# EAGLE board ultrasonic_anemometer_pcb (EAGLE 7.7.0)
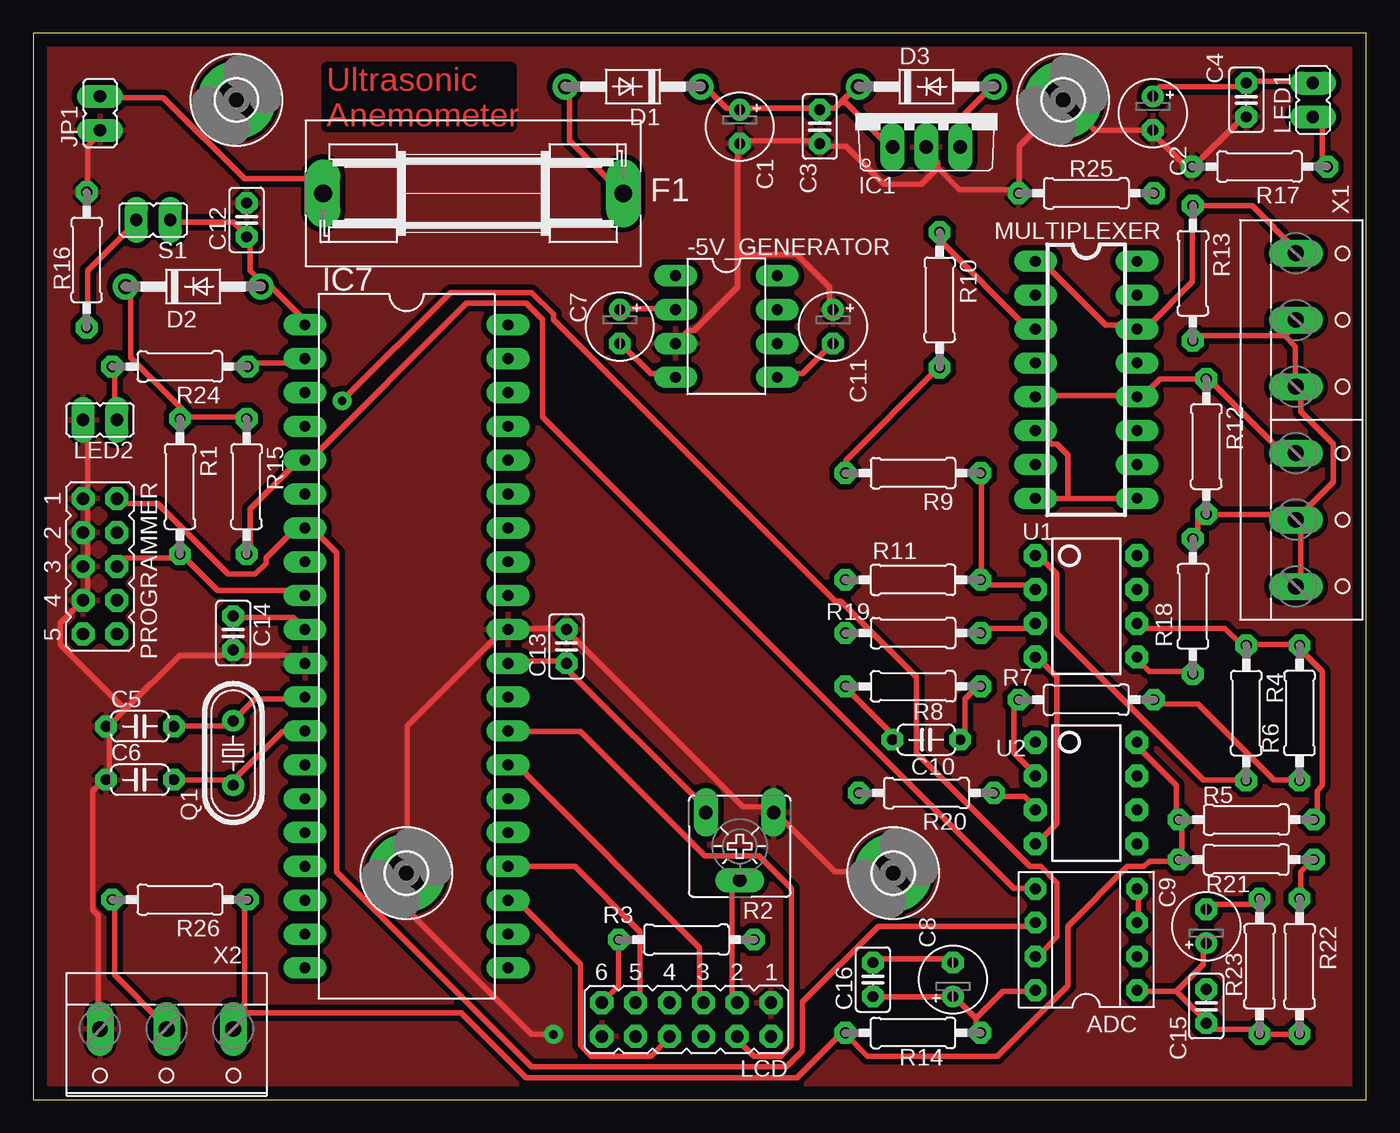
[diagram p0: board, top side]
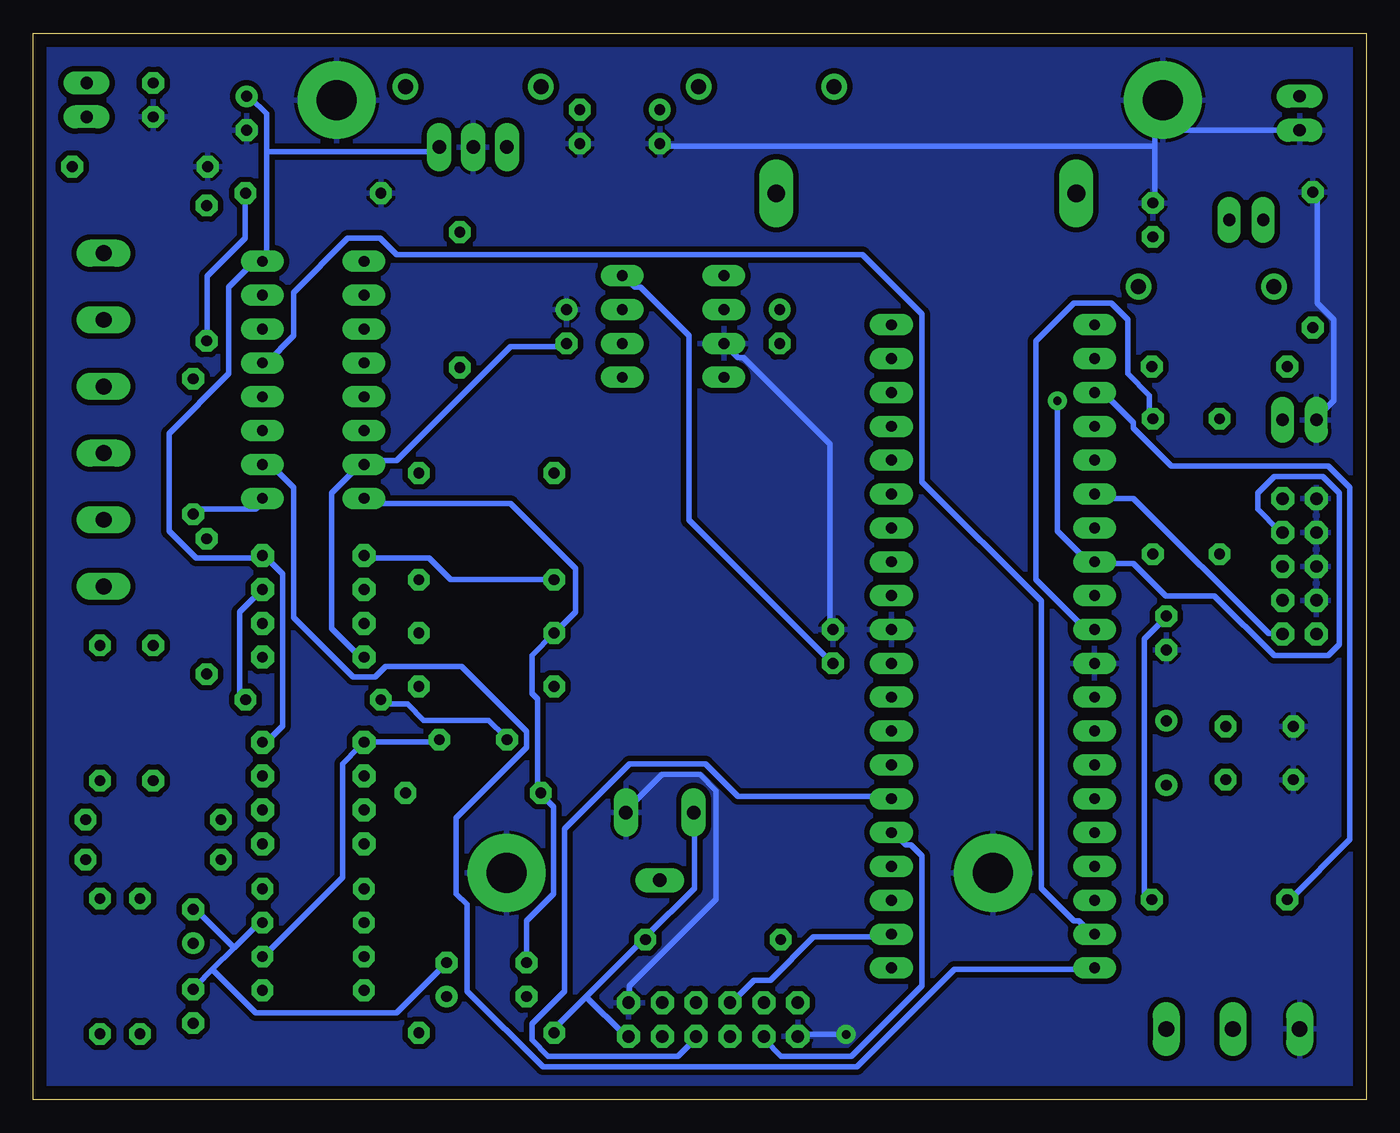
[diagram p1: board, bottom side, seen from below]

Size 100 x 80 mm. Coordinates in mm from the lower left corner, seen from the top.
Outline: 0,0 100,0 100,80 0,80 0,0
Copper layers (1*16): Top 0.035mm / dielectric 1.5mm / Bottom 0.035mm
Design rules "default *": minimum track width 16mil, minimum drill 24mil, track to track 16mil, track to pad 16mil, pad to pad 16mil, via to via 16mil, smd to smd 16mil, copper to edge 40mil, drill to drill 8mil, minimum pad ring 16mil, minimum via ring 16mil, stop-mask expansion 4mil, vias tented up to drill 0mil, thermal gap 10mil

## Footprints (pad centres in the part's own frame; a part is rotated, then mirrored left to right if it is on the bottom)
DIL08 = drill 0.813 long: 1 -3.81,-3.81; 2 -1.27,-3.81; 3 1.27,-3.81; 4 3.81,-3.81; 5 3.81,3.81; 6 1.27,3.81; 7 -1.27,3.81; 8 -3.81,3.81
DIL08' = drill 0.813 pad 1.6 octagon: 1 -3.81,-3.81; 2 -1.27,-3.81; 3 1.27,-3.81; 4 3.81,-3.81; 5 3.81,3.81; 6 1.27,3.81; 7 -1.27,3.81; 8 -3.81,3.81
E2,5-5 = drill 0.813 pad 1.6: + -1.27,0 | drill 0.813 pad 1.6 octagon: - 1.27,0
C025-025X050 = drill 0.813 octagon: 1 -1.27,0; 2 1.27,0
C050-024X044 = drill 0.813 octagon: 1 -2.54,0; 2 2.54,0
DO41-10 = drill 1.118 pad 1.93: A 5.08,0; C -5.08,0
SH22,5A = drill 1.321 pad 2.54 long: 1 -11.252,0; 2 11.252,0
3,0-PAD = drill 3 pad 5.842: B3,0 0,0
TO220V = drill 1.016 long: 1 -2.54,-2.54; 2 0,-2.54; 3 2.54,-2.54
DIL40 = drill 0.813 long: 1 -24.13,-7.62; 2 -21.59,-7.62; 3 -19.05,-7.62; 4 -16.51,-7.62; 5 -13.97,-7.62; 6 -11.43,-7.62; 7 -8.89,-7.62; 8 -6.35,-7.62; 9 -3.81,-7.62; 10 -1.27,-7.62; 11 1.27,-7.62; 12 3.81,-7.62; 13 6.35,-7.62; 14 8.89,-7.62; 15 11.43,-7.62; 16 13.97,-7.62; 17 16.51,-7.62; 18 19.05,-7.62; 19 21.59,-7.62; 20 24.13,-7.62; 21 24.13,7.62; 22 21.59,7.62; 23 19.05,7.62; 24 16.51,7.62; 25 13.97,7.62; 26 11.43,7.62; 27 8.89,7.62; 28 6.35,7.62; 29 3.81,7.62; 30 1.27,7.62; 31 -1.27,7.62; 32 -3.81,7.62; 33 -6.35,7.62; 34 -8.89,7.62; 35 -11.43,7.62; 36 -13.97,7.62; 37 -16.51,7.62; 38 -19.05,7.62; 39 -21.59,7.62; 40 -24.13,7.62
JP1 = drill 0.914 long: 1 0,-1.27; 2 0,1.27
JP6Q = drill 0.914 octagon: 1 -6.35,-1.27; 2 -6.35,1.27; 3 -3.81,-1.27; 4 -3.81,1.27; 5 -1.27,-1.27; 6 -1.27,1.27; 7 1.27,-1.27; 8 1.27,1.27; 9 3.81,-1.27; 10 3.81,1.27; 11 6.35,-1.27; 12 6.35,1.27
DIL16 = drill 0.813 long: 1 -8.89,-3.81; 2 -6.35,-3.81; 3 -3.81,-3.81; 4 -1.27,-3.81; 5 1.27,-3.81; 6 3.81,-3.81; 7 6.35,-3.81; 8 8.89,-3.81; 9 8.89,3.81; 10 6.35,3.81; 11 3.81,3.81; 12 1.27,3.81; 13 -1.27,3.81; 14 -3.81,3.81; 15 -6.35,3.81; 16 -8.89,3.81
JP5Q = drill 0.914 octagon: 1 -5.08,-1.27; 2 -5.08,1.27; 3 -2.54,-1.27; 4 -2.54,1.27; 5 0,-1.27; 6 0,1.27; 7 2.54,-1.27; 8 2.54,1.27; 9 5.08,-1.27; 10 5.08,1.27
HC49/S = drill 0.813: 1 -2.413,0; 2 2.413,0
0207/10 = drill 0.813 octagon: 1 -5.08,0; 2 5.08,0
CA6V = drill 1.016 long: A -2.54,-2.54; E 2.54,-2.54; S 0,2.54
DIP08 = drill 0.813 pad 1.727 octagon: 1 -3.81,-3.81; 2 -1.27,-3.81; 3 1.27,-3.81; 4 3.81,-3.81; 5 3.81,3.81; 6 1.27,3.81; 7 -1.27,3.81; 8 -3.81,3.81
W237-6 = drill 1.194 long: 1 -12.5,-1.27; 2 -7.5,-1.27; 3 -2.5,-1.27; 4 2.5,-1.27; 5 7.5,-1.27; 6 12.5,-1.27
W237-103 = drill 1.194 long: 1 -5,-1.29; 2 0,-1.29; 3 5,-1.29

## Placement (x,y rotation side)
-5V_GENERATOR  ICL7660  [DIL08]  52,58 270 top
ADC  ADS7822P  [DIL08']  79,12 90 top
C1  100μF  [E2,5-5]  53,73 270 top
C2  100μF  [E2,5-5]  84,74 270 top
C3  100nF  [C025-025X050]  59,73 270 top
C4  100nF  [C025-025X050]  91,75 270 top
C5  22pF  [C050-024X044]  8,28 0 top
C6  22pF  [C050-024X044]  8,24 0 top
C7  10μF  [E2,5-5]  44,58 270 top
C8  10μF  [E2,5-5]  69,9 90 top
C9  10μF  [E2,5-5]  88,13 90 top
C10  18pF  [C050-024X044]  67,27 180 top
C11  10μF  [E2,5-5]  60,58 270 top
C12  100nF  [C025-025X050]  16,66 90 top
C13  100nF  [C025-025X050]  40,34 90 top
C14  100nF  [C025-025X050]  15,35 270 top
C15  100nF  [C025-025X050]  88,7 270 top
C16  100nF  [C025-025X050]  63,9 90 top
D1  1N4004  [DO41-10]  45,76 180 top
D2  1N4004  [DO41-10]  12,61 0 top
D3  1N4004  [DO41-10]  67,76 0 top
F1  [SH22,5A]  33,68 0 top
H1  MOUNT-PAD-ROUND3.0  [3,0-PAD]  28,17 0 top
H2  MOUNT-PAD-ROUND3.0  [3,0-PAD]  64.5,17 0 top
H3  MOUNT-PAD-ROUND3.0  [3,0-PAD]  15.25,75 0 top
H4  MOUNT-PAD-ROUND3.0  [3,0-PAD]  77.25,75 0 top
IC1  7805  [TO220V]  67,74 0 top
IC7  ATMEGA1284  [DIL40]  28,34 270 top
JP1  [JP1]  5,74 0 top
LCD  [JP6Q]  49,6 180 top
LED1  [JP1]  96,75 0 top
LED2  [JP1]  5,51 90 top
MULTIPLEXER  74HC4052  [DIL16]  79,54 270 top
PROGRAMMER  [JP5Q]  5,40 270 top
Q1  25Mhz  [HC49/S]  15,26 90 top
R1  10kΩ  [0207/10]  11,46 270 top
R2  100kΩ  [CA6V]  53,19 180 top
R3  220Ω  [0207/10]  49,12 180 top
R4  10kΩ  [0207/10]  91,29 270 top
R5  220kΩ  [0207/10]  91,21 180 top
R6  100kΩ  [0207/10]  95,29 90 top
R7  10kΩ  [0207/10]  79,30 0 top
R8  10kΩ  [0207/10]  66,31 180 top
R9  4.7kΩ  [0207/10]  66,47 180 top
R10  10kΩ  [0207/10]  68,60 270 top
R11  47kΩ  [0207/10]  66,39 0 top
R12  10kΩ  [0207/10]  88,49 270 top
R13  10kΩ  [0207/10]  87,62 270 top
R14  4.7Ω  [0207/10]  66,5 0 top
R15  10kΩ  [0207/10]  16,46 270 top
R16  330Ω  [0207/10]  4,63 270 top
R17  1kΩ  [0207/10]  92,70 180 top
R18  8.2kΩ  [0207/10]  87,37 90 top
R19  10kΩ  [0207/10]  66,35 180 top
R20  4.7kΩ  [0207/10]  67,23 180 top
R21  470Ω  [0207/10]  91,18 0 top
R22  1kΩ  [0207/10]  95,10 270 top
R23  10kΩ  [0207/10]  92,10 90 top
R24  1kΩ  [0207/10]  11,55 180 top
R25  0Ω  [0207/10]  79,68 180 top
R26  4.7kΩ  [0207/10]  11,15 180 top
S1  [JP1]  9,66 90 top
U1  OPAMP-DUALDIP  [DIP08]  79,37 270 top
U2  OPAMP-DUALDIP  [DIP08]  79,23 270 top
X1  [W237-6]  96,51 270 top
X2  [W237-103]  10,4 180 top

## Library data of the parts
-5V_GENERATOR = maxim; MF: INTERSIL; MPN: ICL7660CPA; OC_FARNELL: 1018170; OC_NEWARK: 06F7441
ADC = burr-brown; MF: TEXAS INSTRUMENT CONNECTORS; MPN: ADS7816P; OC_FARNELL: 1097576; OC_NEWARK: 14M9332
C1-C16 R1 R3-R26 = rcl
D1-D3 = adafruit
F1 = fuse; MPN: 0031.7701.11; OC_FARNELL: unknown; OC_NEWARK: 04F1224
H1-H4 = holes
IC1 = linear
IC7 = avr-7
JP1 LCD LED1 LED2 PROGRAMMER S1 = jumper
MULTIPLEXER U1 U2 = SparkFun-AnalogIC
Q1 = crystal; OC_FARNELL: 1667008; OC_NEWARK: unknown
R2 = pot
X1 = con-wago-500; OC_FARNELL: unknown; OC_NEWARK: unknown
X2 = con-wago-500; MPN: 237-103; OC_FARNELL: unknown; OC_NEWARK: 18M7116

## Nets
-5V: -5V_GENERATOR.5 C11.- MULTIPLEXER.7 U1.4 U2.4
AGND: ADC.3 ADC.4 C8.- C9.- C15.1 C16.2 MULTIPLEXER.6 MULTIPLEXER.8 MULTIPLEXER.9 R12.2 R13.2 R18.2 R19.2 R20.2 R23.2 R25.1 X1.2 X1.3 X1.5 X1.6
AREF: IC7.32
DS1820_SENSOR: IC7.3 R26.2 X2.2
GENERATOR_OUT: IC7.19 MULTIPLEXER.13
GND: -5V_GENERATOR.3 C1.- C2.- C3.2 C4.2 C5.1 C6.1 C11.+ C12.2 C13.2 C14.2 H1.B3,0 H2.B3,0 H3.B3,0 H4.B3,0 IC1.2 IC7.11 IC7.31 JP1.1 LCD.1 LCD.12 LED2.2 PROGRAMMER.1 PROGRAMMER.3 PROGRAMMER.5 PROGRAMMER.7 R2.A R16.1 R17.2 R25.2 X2.3
LCD_D4: IC7.22 LCD.7
LCD_D5: IC7.23 LCD.8
LCD_D6: IC7.24 LCD.9
LCD_D7: IC7.25 LCD.10
LCD_E: IC7.26 LCD.6
LCD_RS: IC7.28 LCD.4
LCD_RW: IC7.27 LCD.5
MISO: ADC.6 IC7.7 PROGRAMMER.2
MOSI: IC7.6 PROGRAMMER.10
N$1: F1.1 JP1.2
N$2: D1.A F1.2
N$3: C1.+ C3.1 D1.C D3.C IC1.1
N$4: MULTIPLEXER.1 MULTIPLEXER.14 R13.1 X1.1
N$5: MULTIPLEXER.5 MULTIPLEXER.12 R12.1 X1.4
N$6: R9.1 R11.2 U1.2
N$7: R19.1 U1.3
N$8: R18.1 U1.5
N$9: R20.1 U2.3
N$10: C12.1 D2.A IC7.1 S1.1
N$11: C5.2 IC7.12 Q1.2
N$12: C6.2 IC7.13 Q1.1
N$13: C10.2 R7.1 R8.2 U2.2
N$14: -5V_GENERATOR.2 C7.+
N$15: -5V_GENERATOR.4 C7.-
N$16: R9.2 R10.2
N$17: R4.1 R5.1 R6.2 U1.6
N$18: R6.1 R7.2 U1.7
N$19: LCD.11 R3.2
N$20: R16.2 S1.2
N$21: LCD.3 R2.S
N$22: ADC.1 C9.+ C15.2 R22.2 R23.1
N$23: LED2.1 R24.2
N$24: LED1.1 R17.1
N$25: ADC.8 C8.+ C16.1 R14.2
N$29: R21.2 R22.1
N$30: ADC.2 C10.1 R8.1 U2.1
N$31: IC7.2 R24.1
N$33: R4.2 R11.1 U1.1
N$34: MULTIPLEXER.3 R10.1
RESET: IC7.9 PROGRAMMER.6 R1.2
SCK: ADC.7 IC7.8 PROGRAMMER.4
SS: ADC.5 IC7.5 R15.2
SWITCH_CHANNEL: IC7.20 MULTIPLEXER.10
VCC: -5V_GENERATOR.8 C2.+ C4.1 C13.1 C14.1 D2.C D3.A IC1.3 IC7.10 IC7.30 LCD.2 LED1.2 MULTIPLEXER.16 R1.1 R2.E R3.1 R5.2 R14.1 R15.1 R21.1 R26.1 U1.8 U2.8 X2.1

## Tracks (layer width: path | path; a pad name or v marks a point on that pad's centre or on a via)
-5V
  Top 0.406: -5V_GENERATOR.5 56.08,54.46 57.71,54.46 59.74,56.49 C11.- | U2.4 75.59,19.51 76.81,20.73 76.81,31.7 75.59,32.92 U1.4
  Bottom 0.406: U1.4 75.59,33.33 77.62,35.36 77.62,45.52 75.59,47.55 MULTIPLEXER.7 75.18,47.95 72.75,47.95 64.21,56.49 60.15,56.49 C11.-
AGND
  Top 0.406: 93.88,57.3 87.38,57.3 R13.2 | 93.88,57.3 94.69,58.12 X1.2 | 93.88,57.3 94.69,56.49 94.69,53.65 X1.3 95.1,53.24 95.1,51.61 97.54,49.17 97.54,46.33 95.1,43.89 X1.5 | X1.6 95.1,38.61 95.1,43.48 X1.5 | R18.2 87.38,42.27 87.38,43.48 87.78,43.89 R12.2 88.19,43.89 94.69,43.89 X1.5 | 77.62,45.11 82.5,45.11 MULTIPLEXER.9 | 77.62,45.11 75.59,45.11 MULTIPLEXER.8 | 77.62,45.11 77.62,48.36 76.81,49.17 76.4,49.17 75.59,49.99 MULTIPLEXER.6 | C9.- 88.19,14.63 91.44,14.63 91.85,15.04 R23.2 | ADC.3 82.91,13.41 82.91,15.44 ADC.4 | C16.2 63.4,10.57 68.68,10.57 C8.-
  Bottom 0.406: R25.1 84.12,67.87 84.12,64.62 86.97,61.77 86.97,57.3 R13.2 | R12.2 87.78,44.3 83.31,44.3 82.91,44.7 MULTIPLEXER.9 | 84.94,11.38 82.91,13.41 ADC.3 | 84.94,11.38 86.56,9.75 | 86.56,9.75 87.78,8.53 C15.1 | 84.94,11.38 87.78,14.22 C9.- | C16.2 62.99,10.57 62.99,13.41 60.96,15.44 60.96,21.95 61.77,22.76 R20.2 62.18,23.16 62.18,30.07 62.59,30.48 62.59,33.33 60.96,34.95 R19.2 60.55,35.36 59.33,36.58 59.33,39.83 64.21,44.7 75.18,44.7 MULTIPLEXER.8 | 86.56,9.75 83.31,6.5 72.75,6.5 69.09,10.16 C8.-
DS1820_SENSOR
  Top 0.406: R26.2 6.1,14.63 6.1,9.35 9.75,5.69 X2.2
  Bottom 0.406: IC7.3 20.32,52.83 19.51,52.83 17.48,50.8 17.48,50.39 14.63,47.55 2.85,47.55 1.22,45.92 1.22,19.51 5.69,15.04 R26.2
GENERATOR_OUT
  Bottom 0.406: IC7.19 20.73,12.6 21.54,13.41 21.95,13.41 24.38,15.85 24.38,37.39 33.33,46.33 33.33,58.93 37.8,63.4 72.75,63.4 73.97,64.62 76.4,64.62 80.47,60.55 80.47,57.3 82.5,55.27 MULTIPLEXER.13
GND  (via drill 0.61)
  Top 0.406: R16.1 4.06,68.28 4.06,71.53 4.88,72.34 JP1.1 | LED2.2 4.06,50.8 4.06,45.11 PROGRAMMER.1 4.06,44.7 4.06,42.67 PROGRAMMER.3 4.06,42.27 4.06,40.23 PROGRAMMER.5 4.06,39.83 4.06,37.8 PROGRAMMER.7 3.66,37.39 2.03,35.76 2.03,34.14 6.91,29.26 | IC7.11 20.32,32.92 19.91,33.33 15.04,33.33 C14.2 14.63,33.33 10.97,33.33 6.91,29.26 | X2.3 4.88,5.69 4.88,13.82 4.47,14.22 4.47,23.16 5.28,23.98 C6.1 5.69,24.38 5.69,27.64 C5.1 5.69,28.04 6.91,29.26 | 52.83,63.4 52.83,71.53 C1.- 53.24,71.93 58.93,71.93 C3.2 59.33,71.53 60.96,71.53 63.8,68.68 66.65,68.68 67.87,69.9 | 52.83,63.4 52.83,60.96 49.58,57.71 49.17,57.71 48.36,56.9 -5V_GENERATOR.3 | 52.83,63.4 57.3,63.4 59.74,60.96 59.74,59.33 C11.+ | C4.2 90.63,73.56 86.97,69.9 R17.2 86.56,69.9 84.12,72.34 C2.- 83.72,72.75 79.65,72.75 77.62,74.78 H4.B3,0 77.22,74.78 73.97,71.53 73.97,68.28 R25.2 73.56,68.28 69.49,68.28 67.87,69.9 | 67.87,69.9 67.87,70.31 67.06,71.12 IC1.2 | v39.01,4.88 37.39,4.88 28.04,14.22 28.04,16.66 H1.B3,0 28.04,17.07 28.04,28.04 35.36,35.36 IC7.31 35.76,35.36 39.83,35.36 C13.2 40.23,34.95 53.24,21.95 55.27,21.95 R2.A 55.68,21.54 60.15,17.07 64.21,17.07 H2.B3,0
  Bottom 0.406: 15.85,72.75 15.85,74.37 15.44,74.78 H3.B3,0 15.85,72.75 | 15.85,72.75 15.85,71.53 | 15.85,71.53 15.85,67.46 C12.2 | 15.85,72.75 5.28,72.75 JP1.1 | R16.1 3.66,67.87 3.66,59.74 2.44,58.52 2.44,52.43 3.66,51.21 LED2.2 | v39.01,4.88 42.27,4.88 LCD.12 | LCD.1 55.27,7.32 55.27,8.53 48.77,15.04 48.77,23.16 49.99,24.38 52.83,24.38 55.27,21.95 R2.A | -5V_GENERATOR.3 47.95,56.49 47.14,55.68 46.74,55.68 40.23,49.17 40.23,35.36 C13.2 | 15.85,71.53 52.83,71.53 C1.-
  pour Bottom (isolate 0.406): -1,80 100,80 100,-1 -1,-1
  pour Top: -2,80 100,80 100,-1 -2,-1
LCD_D4
  Bottom 0.406: IC7.22 35.76,12.19 41.45,12.19 44.7,8.94 45.92,8.94 47.55,7.32 LCD.7
LCD_D5
  Top 0.406: IC7.23 35.76,14.63 36.58,14.63 41.05,10.16 41.05,4.06 41.86,3.25 46.33,3.25 47.55,4.47 LCD.8
LCD_D6
  Top 0.406: IC7.24 35.76,17.48 40.64,17.48 45.52,12.6 45.52,7.32 LCD.9
LCD_D7
  Bottom 0.406: IC7.25 35.36,19.91 34.54,19.1 34.14,19.1 33.33,18.29 33.33,8.53 38.61,3.25 43.89,3.25 45.11,4.47 LCD.10
LCD_E
  Bottom 0.406: IC7.26 35.76,22.76 47.14,22.76 49.58,25.2 55.27,25.2 60.15,20.32 60.15,8.13 62.59,5.69 62.59,4.47 61.37,3.25 51.61,3.25 50.39,4.47 LCD.6
LCD_RS
  Top 0.406: IC7.28 35.76,27.64 41.05,27.64 50.39,18.29 54.46,18.29 56.9,15.85 56.9,4.06 56.08,3.25 54.05,3.25 52.83,4.47 LCD.4
LCD_RW
  Top 0.406: IC7.27 35.76,24.79 36.58,24.79 49.99,11.38 49.99,7.32 LCD.5
MISO
  Top 0.406: PROGRAMMER.2 6.5,44.7 9.35,44.7 14.63,39.42 16.66,39.42 17.48,40.23 17.48,40.64 19.51,42.67 20.32,42.67 IC7.7 20.73,43.08 22.76,41.05 22.76,17.07 37.39,2.44 56.49,2.44 57.71,3.66 57.71,7.32 63.4,13.01 75.18,13.01 ADC.6
MOSI
  Bottom 0.406: IC7.6 20.32,45.11 17.48,45.11 7.32,34.95 6.5,34.95 PROGRAMMER.10
N$1
  Top 0.406: JP1.2 5.28,75.18 9.75,75.18 15.85,69.09 20.73,69.09 21.54,68.28 F1.1
N$2
  Top 0.406: D1.A 40.23,76 40.23,71.93 43.89,68.28 F1.2
N$3
  Top 0.406: D1.C 50.39,76 52.02,74.37 52.83,74.37 C1.+ 53.24,74.37 58.93,74.37 C3.1 59.33,74.37 60.15,74.37 60.55,74.78 | 60.55,74.78 61.77,76 D3.C | 60.55,74.78 60.96,74.78 64.21,71.53 IC1.1
N$4
  Top 0.406: X1.1 94.69,63.8 91.44,67.06 87.38,67.06 R13.1 86.97,67.06 86.97,61.37 83.72,58.12 82.91,58.12 MULTIPLEXER.14 82.5,58.12 80.47,58.12 75.59,62.99 MULTIPLEXER.1
N$5
  Top 0.406: MULTIPLEXER.5 75.59,52.83 82.5,52.83 MULTIPLEXER.12 82.91,52.43 84.53,54.05 87.78,54.05 R12.1 88.19,54.05 93.47,48.77 94.69,48.77 X1.4
N$6
  Top 0.406: U1.2 75.18,38.61 71.12,38.61 R11.2 71.12,39.01 71.12,46.74 R9.1
N$7
  Top 0.406: R19.1 71.12,35.36 75.18,35.36 U1.3
N$8
  Top 0.406: R18.1 86.97,32.11 83.72,32.11 82.91,32.92 U1.5
N$9
  Top 0.406: R20.1 72.34,22.76 74.37,22.76 75.18,21.95 U2.3
N$10
  Top 0.406: IC7.1 20.32,58.52 17.48,61.37 D2.A 17.07,61.37 16.26,62.18 16.26,64.62 C12.1 15.85,65.02 15.04,65.84 10.57,65.84 S1.1
N$11
  Top 0.406: C5.2 10.57,28.04 14.63,28.04 Q1.2 15.04,28.45 16.66,30.07 20.32,30.07 IC7.12
N$12
  Top 0.406: C6.2 10.57,23.98 14.63,23.98 Q1.1 15.04,23.98 18.69,27.64 20.32,27.64 IC7.13
N$13
  Top 0.406: R7.1 73.56,29.67 73.56,26.01 75.18,24.38 U2.2 | R8.2 60.96,30.89 64.62,27.23 C10.2
  Bottom 0.406: R7.1 73.56,29.67 71.93,29.67 70.71,28.45 65.84,28.45 64.62,27.23 C10.2
N$14
  Top 0.406: C7.+ 44.3,59.33 47.95,59.33 -5V_GENERATOR.2
N$15
  Top 0.406: -5V_GENERATOR.4 47.95,54.46 46.33,54.46 44.3,56.49 C7.-
N$16
  Top 0.406: R9.2 60.96,47.14 60.96,47.95 67.87,54.86 R10.2
N$17
  Top 0.406: R5.1 96.32,21.13 96.32,23.16 96.72,23.57 96.72,32.11 95.1,33.73 R6.2 94.69,34.14 91.03,34.14 R4.1 90.63,34.14 89.41,35.36 82.91,35.36 U1.6
N$18
  Top 0.406: R6.1 94.69,23.98 93.07,23.98 87.38,29.67 84.12,29.67 R7.2
  Bottom 0.406: U1.7 82.91,38.2 84.53,36.58 84.53,30.48 84.12,30.07 R7.2
N$19
  Top 0.406: R3.2 43.89,11.79 43.89,8.53 42.67,7.32 LCD.11
N$20
  Top 0.406: R16.2 4.06,58.12 4.06,62.18 7.72,65.84 S1.2
N$21
  Top 0.406: LCD.3 52.43,7.32 52.43,15.85 52.83,16.26 R2.S
N$22
  Top 0.406: R22.2 94.69,4.88 92.25,4.88 R23.1 91.85,5.28 88.59,5.28 88.19,5.69 C15.2 87.78,6.1 85.75,8.13 | 85.75,8.13 82.91,8.13 ADC.1 | 85.75,8.13 87.78,10.16 87.78,11.38 C9.+
N$23
  Top 0.406: R24.2 6.1,54.86 6.1,51.21 LED2.1
N$24
  Top 0.406: R17.1 96.72,70.31 96.72,73.15 96.32,73.56 LED1.1
N$25
  Top 0.406: 70.71,6.1 70.71,5.28 R14.2 | 70.71,6.1 69.09,7.72 C8.+ 68.68,7.72 63.4,7.72 C16.1 | 70.71,6.1 72.75,8.13 75.18,8.13 ADC.8
N$29
  Top 0.406: R22.1 95.1,15.44 95.1,17.07 95.91,17.88 R21.2
N$30
  Top 0.406: C10.1 69.9,27.23 69.9,30.07 70.71,30.89 R8.1
  Bottom 0.406: ADC.2 82.5,10.97 76.81,16.66 76.81,25.2 75.59,26.42 U2.1 75.18,26.82 69.9,26.82 C10.1
N$31
  Top 0.406: R24.1 16.26,55.27 20.32,55.27 IC7.2
N$33
  Top 0.406: R4.2 90.63,23.98 87.78,23.98 76.81,34.95 76.81,39.42 75.59,40.64 U1.1
  Bottom 0.406: R11.1 60.96,39.01 68.68,39.01 70.31,40.64 75.18,40.64 U1.1
N$34
  Top 0.406: MULTIPLEXER.3 75.18,58.12 74.37,58.12 68.28,64.21 68.28,65.02 R10.1
RESET
  Top 0.406: PROGRAMMER.6 6.5,40.23 6.91,40.64 10.97,40.64 R1.2 11.38,40.64 13.82,38.2 20.32,38.2 IC7.9
SCK  (via drill 0.61)
  Top 0.406: v23.16,52.43 31.29,60.55 37.39,60.55 39.01,58.93 39.01,58.52 60.15,37.39 60.55,37.39 66.24,31.7 66.24,26.01 74.78,17.48 75.59,17.48 76.81,16.26 76.81,12.19 75.59,10.97 ADC.7
  Bottom 0.406: PROGRAMMER.4 6.5,42.67 8.13,44.3 8.13,45.52 6.91,46.74 3.25,46.74 2.03,45.52 2.03,34.14 2.85,33.33 6.91,33.33 11.38,37.8 15.04,37.8 17.48,40.23 20.32,40.23 IC7.8 20.73,40.23 23.16,42.67 v23.16,52.43
SS
  Top 0.406: R15.2 16.26,41.05 16.26,44.3 20.32,48.36 IC7.5 20.73,47.95 32.51,59.74 36.98,59.74 38.2,58.52 38.2,51.21 73.56,15.85 75.18,15.85 ADC.5
SWITCH_CHANNEL
  Bottom 0.406: IC7.20 20.73,9.75 30.89,9.75 38.2,2.44 61.77,2.44 67.46,8.13 67.46,14.63 68.28,15.44 68.28,21.13 62.99,26.42 62.99,27.64 67.87,32.51 73.56,32.51 74.37,31.7 76,31.7 80.47,36.17 80.47,45.92 82.5,47.95 MULTIPLEXER.10
VCC
  Top 0.406: U2.8 82.91,26.42 85.75,23.57 85.75,21.13 R5.2 86.16,20.73 86.16,18.29 R21.1 85.75,17.88 83.72,17.88 83.31,17.48 82.09,17.48 77.62,13.01 77.62,8.53 72.34,3.25 62.59,3.25 60.96,4.88 R14.1 60.55,4.88 57.3,1.63 36.98,1.63 32.11,6.5 15.85,6.5 | IC1.3 69.9,71.53 69.9,73.97 71.93,76 D3.A | LED1.2 95.91,76.4 91.03,76.4 C4.1 90.63,76 84.53,76 84.12,75.59 C2.+ | 11.79,51.21 15.85,51.21 R15.1 | 11.79,51.21 11.38,51.21 R1.1 11.79,51.21 | 11.79,51.21 7.32,55.68 7.32,60.96 D2.C | C14.1 15.04,36.17 19.51,36.17 20.32,35.36 IC7.10 | 15.85,6.5 15.85,14.63 R26.1 | 15.85,6.5 15.04,5.69 X2.1 15.85,6.5 | IC7.30 35.76,32.92 39.83,32.92 C13.1 39.83,32.51 50.39,21.95 R2.E
  Bottom 0.406: U2.8 82.5,26.82 81.28,28.04 81.28,39.42 82.5,40.64 U1.8 82.91,40.64 87.78,40.64 89.81,42.67 89.81,49.99 85.34,54.46 85.34,60.96 83.72,62.59 82.91,62.59 MULTIPLEXER.16 82.5,62.99 82.5,71.12 | 82.5,71.12 82.5,73.97 83.72,75.18 C2.+ | 82.5,71.12 69.9,71.12 IC1.3 | C14.1 15.04,36.17 16.66,34.54 16.66,15.44 16.26,15.04 R26.1 | R15.1 16.26,51.21 16.26,52.83 17.88,54.46 17.88,58.52 19.1,59.74 21.95,59.74 24.79,56.9 24.79,39.01 20.73,34.95 IC7.10 | 58.52,7.72 60.96,5.28 R14.1 | 58.52,7.72 54.46,11.79 R3.1 54.05,12.19 50.39,15.85 50.39,21.54 R2.E | 58.52,7.72 55.68,4.88 LCD.2 | -5V_GENERATOR.8 55.68,61.77 54.86,60.96 54.46,60.96 50.8,57.3 50.8,43.48 40.23,32.92 C13.1

## Text on the board
Top: Ultrasonic / Anemometer